# Altium PCB ExperimentBoard.PcbDoc
Units mil, origin at the board's own origin, x right, y up, seen from the top; angles counter-clockwise.
Board outline 3540 x 3540 mil, 4 copper layers (Top Layer, GND Layer, PWR Layer, Bottom Layer), stack 61.811 mil thick; 32 components, 57 nets, 238 pads, 67 vias.
Unrouted connection lines stored in the file: 9.
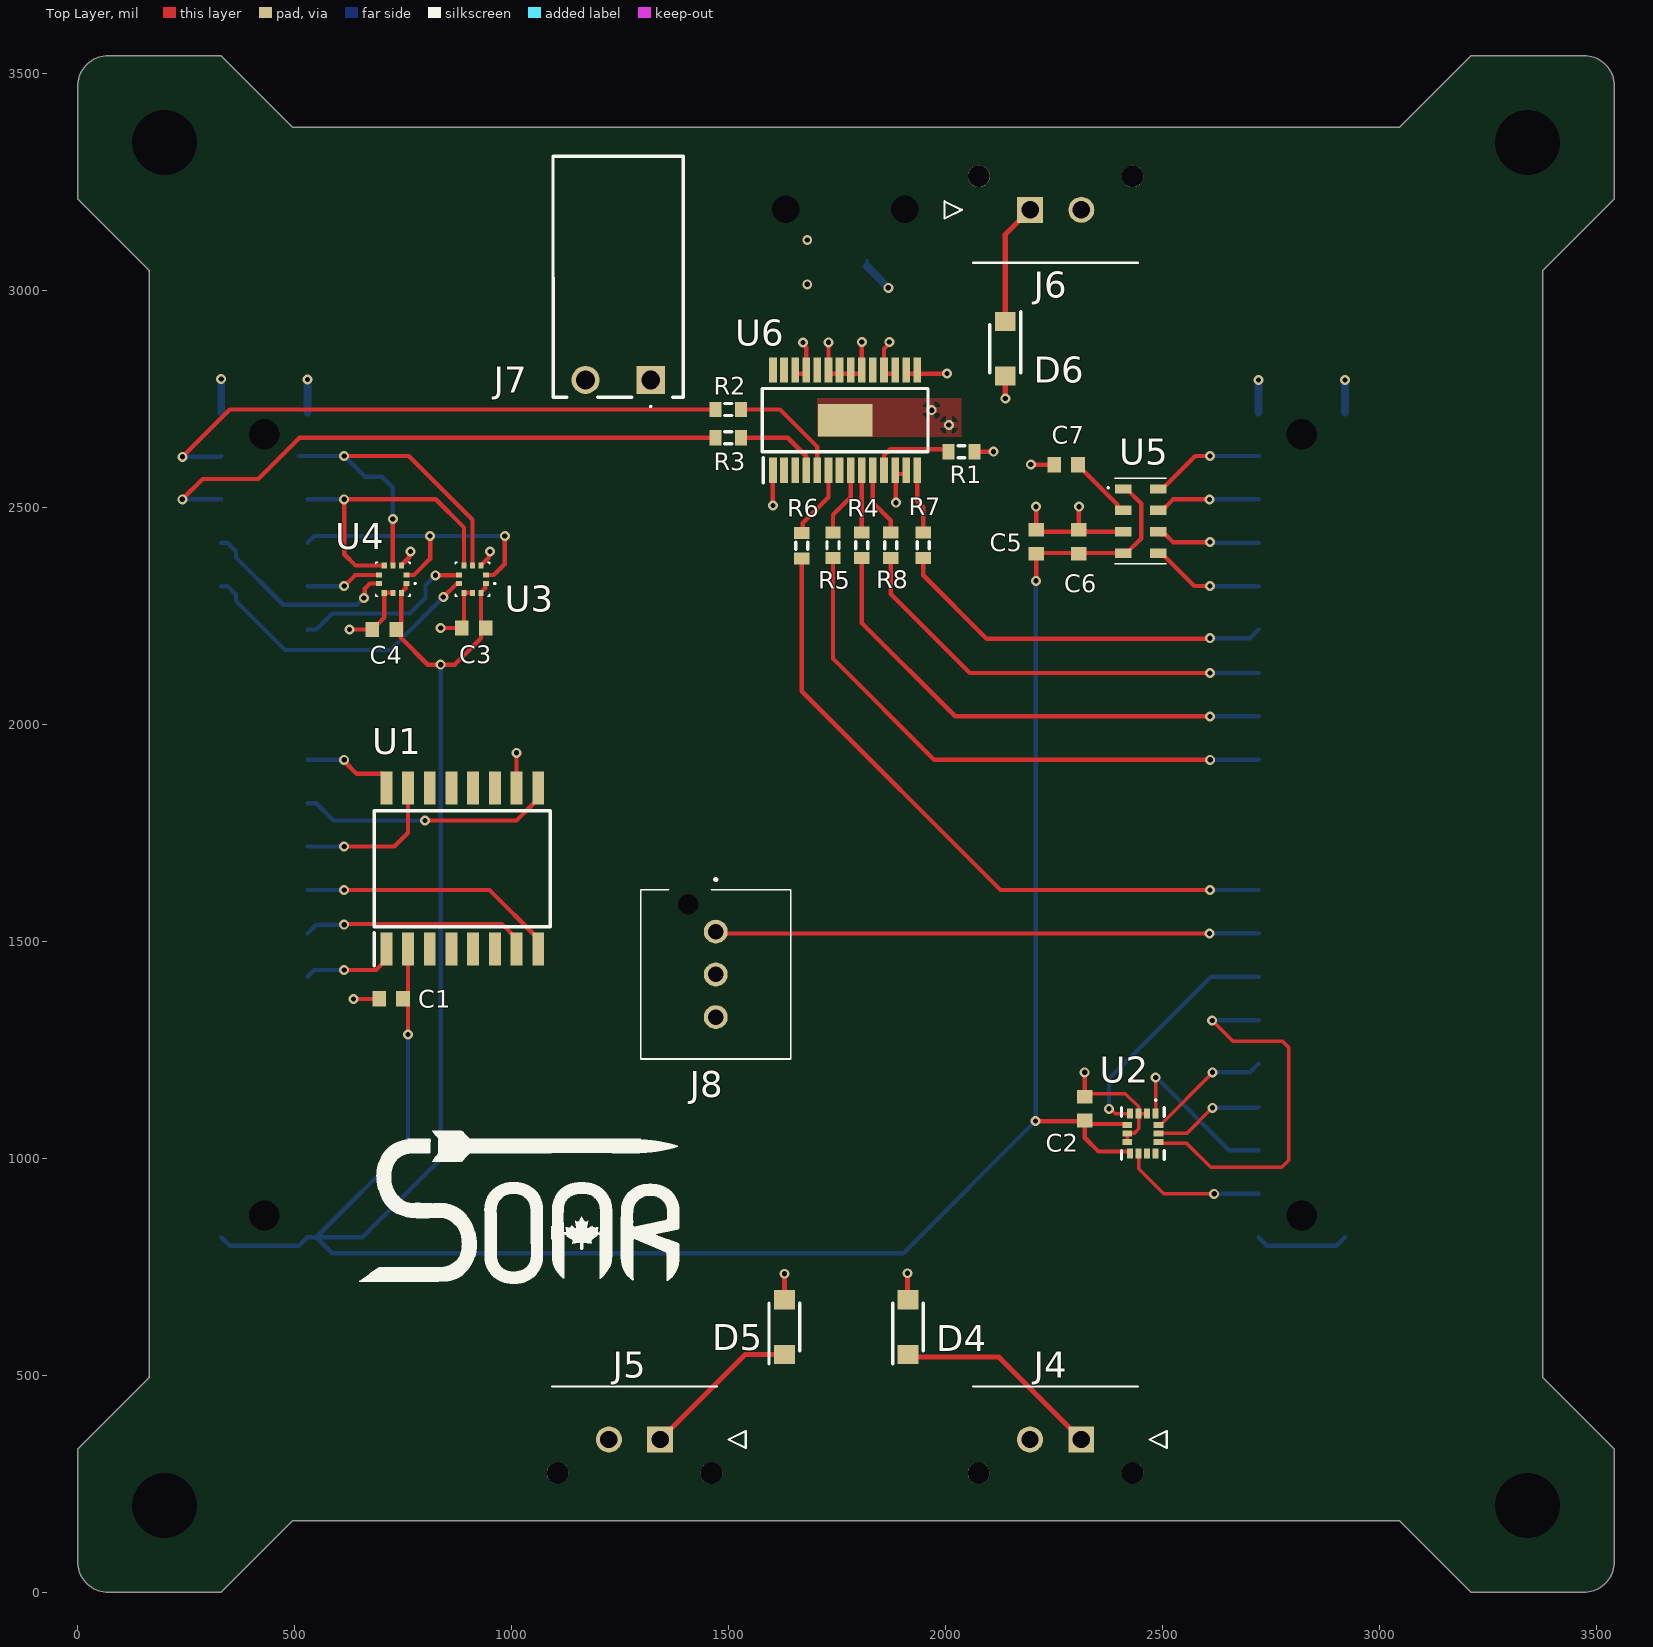
[diagram p0: Top Layer view]
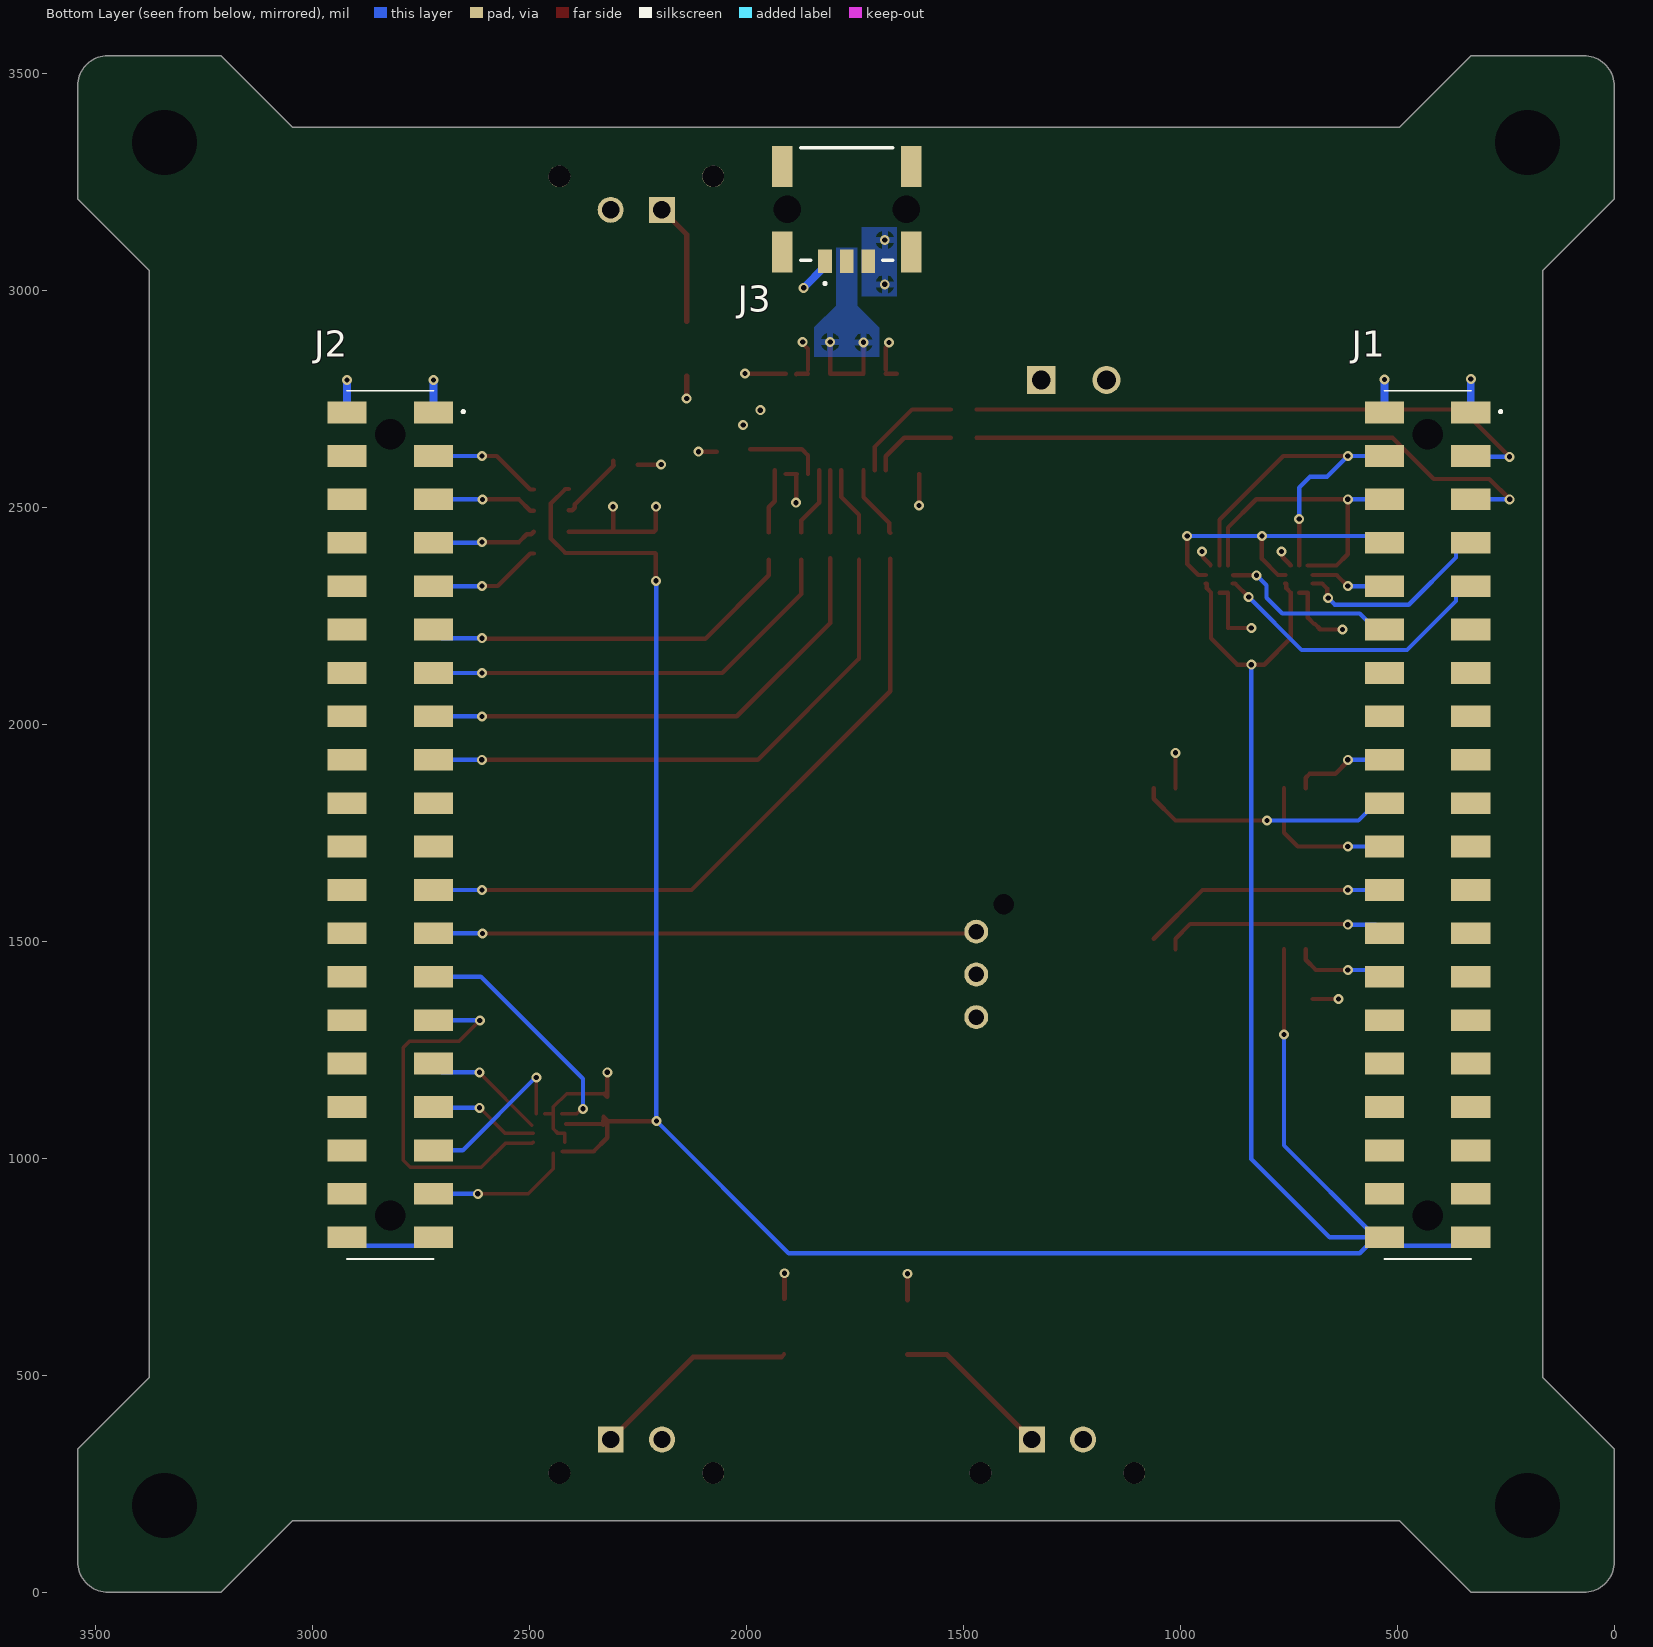
[diagram p1: Bottom Layer view, seen from below]
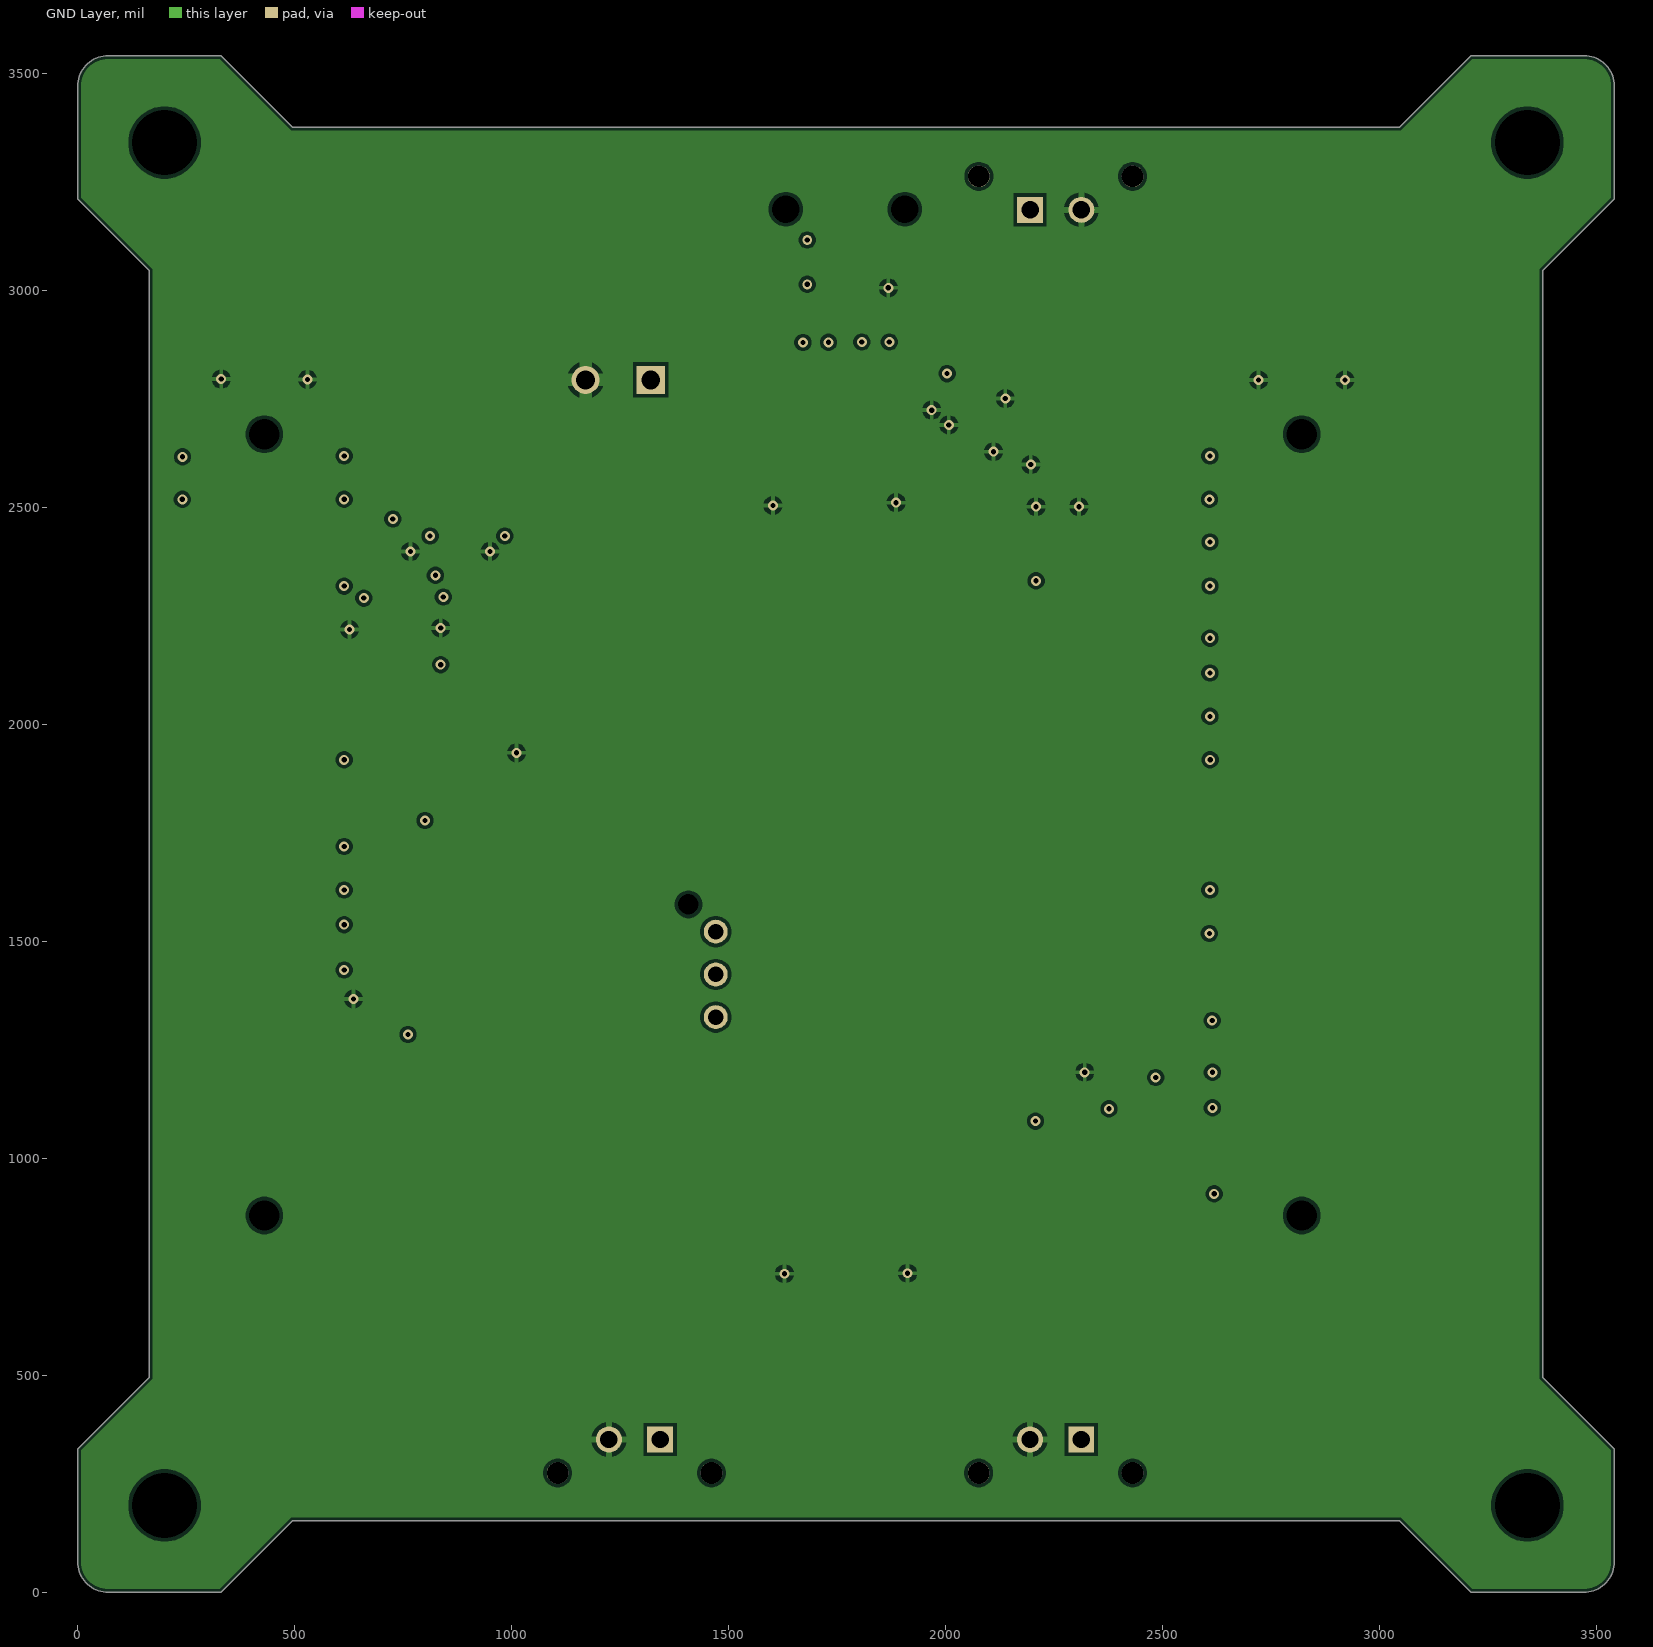
[diagram p2: GND Layer]
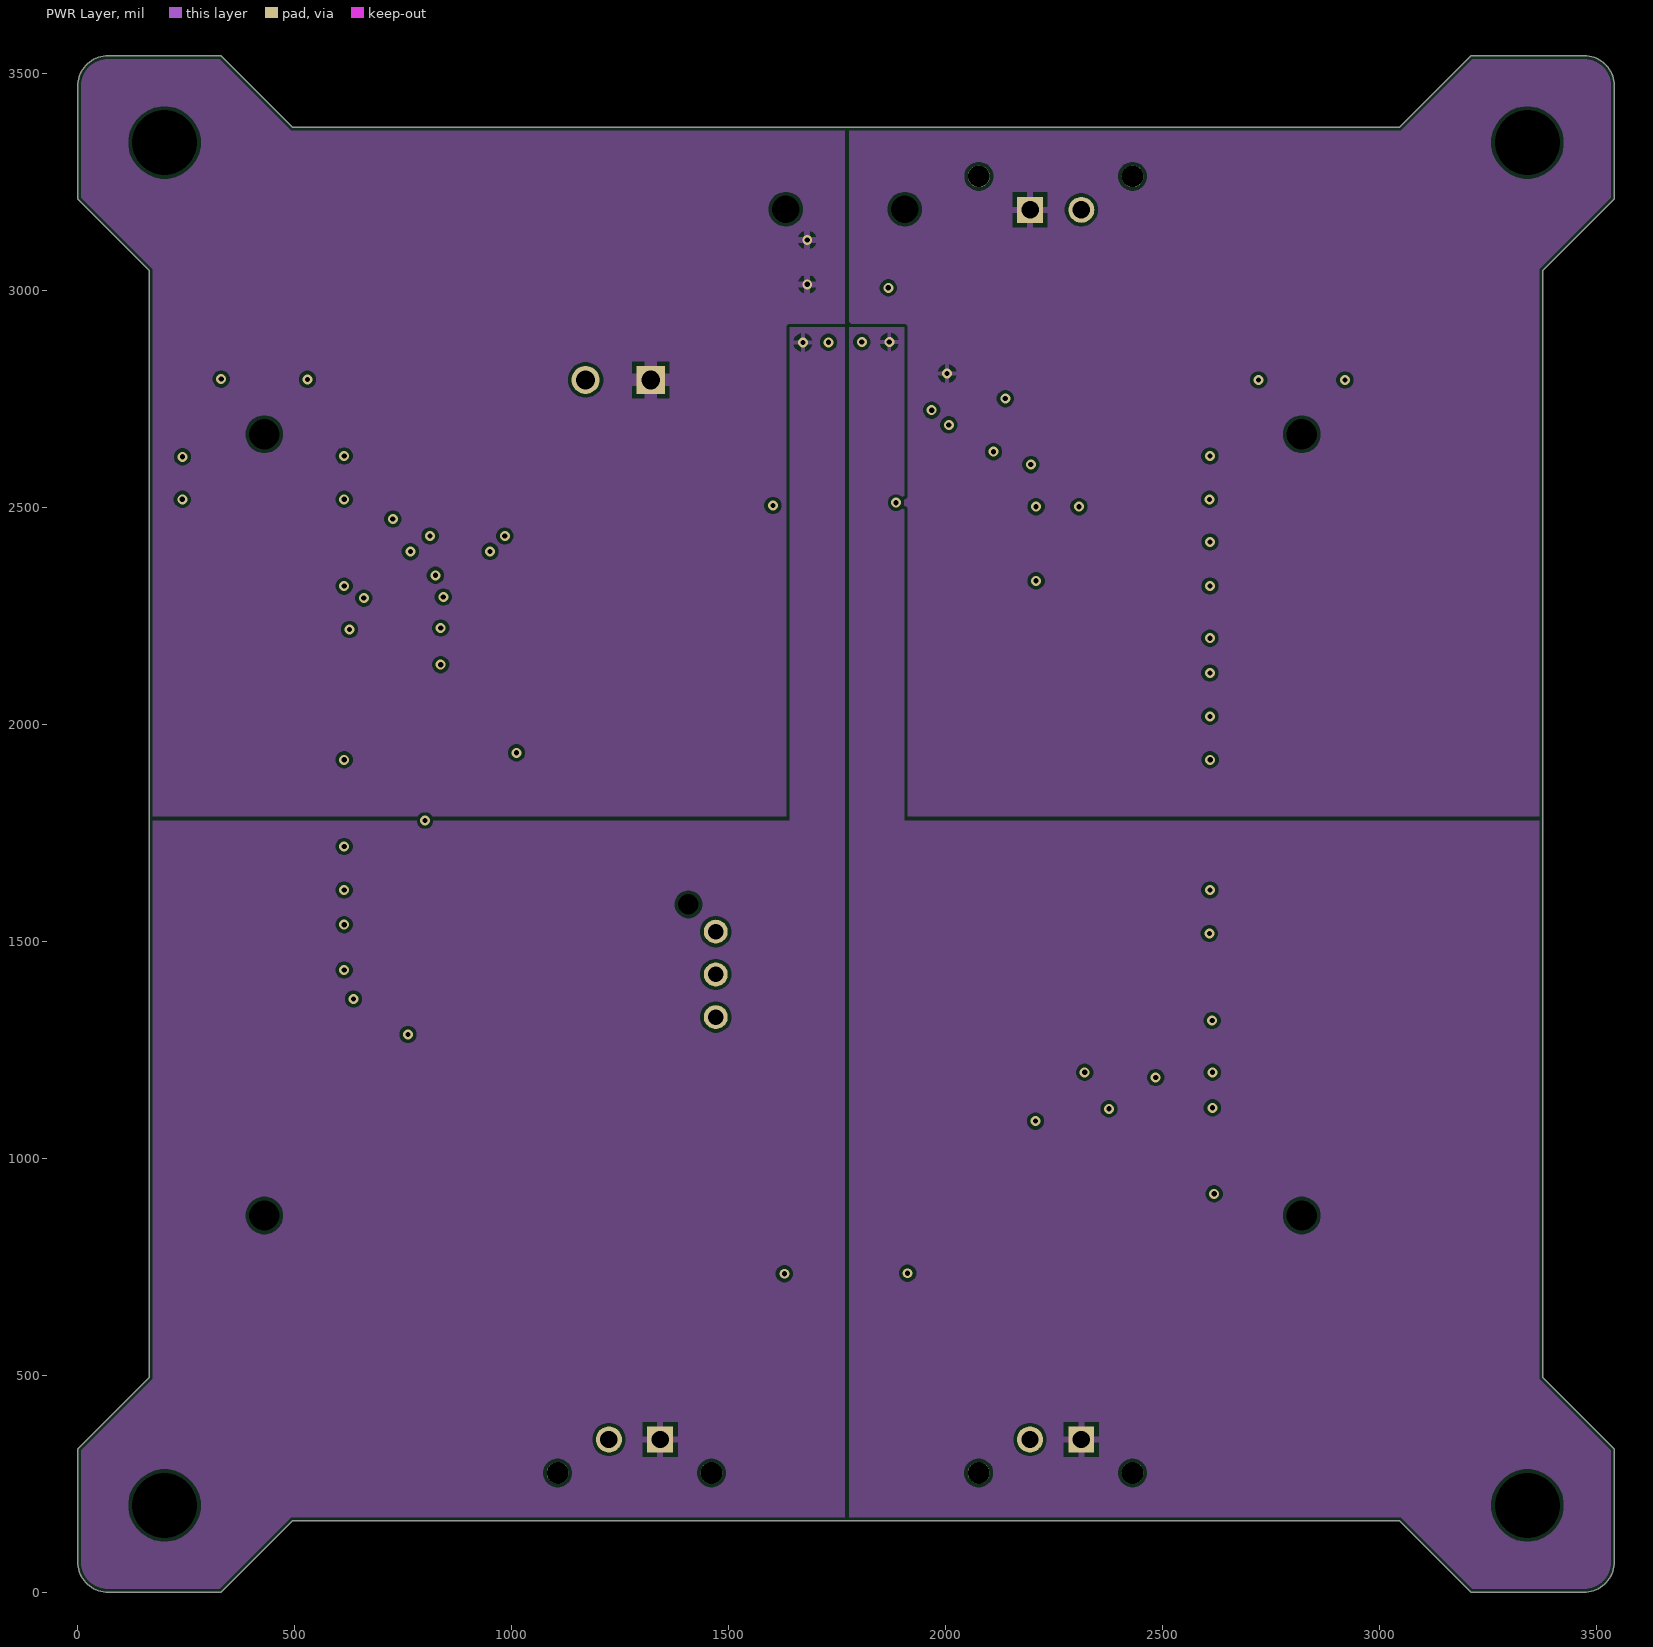
[diagram p3: PWR Layer]

## Layer stack, top to bottom
Top Mask: solder mask 0.591, Solder Resist, Dk 3.8
Top Layer: signal copper 1.378
Dielectric 1: prepreg 7.874, 7628, Dk 4.6
GND Layer: signal copper 0.689
Core: core 41.929, FR-4, Dk 4.5
PWR Layer: signal copper 0.689
Dielectric 2: prepreg 7.874, 7628, Dk 4.6
Bottom Layer: signal copper 1.378
Bottom Mask: solder mask 0.591, Solder Resist, Dk 3.8

## Board outline
0,3470 cw(c70,3470) 70,3540 330,3540 495,3375 3045,3375 3210,3540 3471,3540 cw(c3471,3471) 3540,3471 3540,3210 3375,3045 3375,495 3540,330 3540,70 cw(c3470,70) 3470,0 3210,0 3045,165 495,165 330,0 70,0 cw(c70,70) 0,70 0,330 165,495 165,3045 0,3210

## Design rules (kind name [scope] priority, off if disabled: settings)
BoardOutlineClearance [All] p1: gap=7.87 ignorepadtopadclearanceinfootprint=FALSE except(15.75: Arc-SplitBarrior Arc-SplitContinuation Track-SplitBarrior Track-SplitContinuation SMDPad-SplitBarrior SMDPad-SplitContinuation THPad-SplitBarrior THPad-SplitContinuation Via-SplitBarrior Via-SplitContinuation Fill-SplitBarrior Fill-SplitContinuation Poly-SplitBarrior Poly-SplitContinuation Region-SplitBarrior Region-SplitContinuation Text-SplitBarrior Text-SplitContinuation)
Clearance "Clearance Bottom Layer" [OnLayer('Bottom Layer')] p1: gap=8 ignorepadtopadclearanceinfootprint=TRUE except(10: Arc-Text Track-Text SMDPad-Text THPad-Text Via-Text Fill-Text Poly-Text Region-Text Text-Text)
Clearance "Clearance Top Layer" [OnLayer('Top Layer')] p2: gap=8 ignorepadtopadclearanceinfootprint=TRUE except(10: Arc-Text Track-Text SMDPad-Text THPad-Text Via-Text Fill-Text Poly-Text Region-Text Text-Text)
Clearance [All] p3: gap=7.87 ignorepadtopadclearanceinfootprint=FALSE except(3.5: Arc-Arc Arc-Track Arc-SMDPad Track-Track Track-SMDPad SMDPad-SMDPad; 5: Arc-Via Track-Via SMDPad-Via THPad-Via Via-Via; 10: Arc-Text Track-Text SMDPad-Text THPad-Text Via-Text Fill-Text Poly-Text Region-Text Text-Text)
HoleSize [All] p1: absolutevalues=TRUE maxlimit=248.03 minlimit=7.87 maxpercent=80.000 minpercent=20.000
MinimumAnnularRing [All] p1: minimumring=3
MinimumSolderMaskSliver [All] p1: minsoldermaskwidth=3.5
PolygonConnect PolygonConnect_3 [All vs IsNamedPolygon('12V1') OR IsNamedPolygon('12V2') OR InComponent('J7')] p1: thpad.connectstyle=Relief thpad.reliefconductorwidth=30 thpad.reliefentries=4 thpad.polygonreliefangle="90 Angle" thpad.airgapwidth=10 smdpad.connectstyle=Direct smdpad.reliefconductorwidth=10 smdpad.reliefentries=4 smdpad.polygonreliefangle="90 Angle" smdpad.airgapwidth=10 via.connectstyle=Relief via.reliefconductorwidth=15 via.reliefentries=4 via.polygonreliefangle="90 Angle" via.airgapwidth=10
PolygonConnect PolygonConnect_2 [(InComponent('J4') OR InComponent('J5') OR InComponent('J6'))] p2: thpad.connectstyle=Relief thpad.reliefconductorwidth=15 thpad.reliefentries=4 thpad.polygonreliefangle="90 Angle" thpad.airgapwidth=10 smdpad.connectstyle=Relief smdpad.reliefconductorwidth=10 smdpad.reliefentries=4 smdpad.polygonreliefangle="90 Angle" smdpad.airgapwidth=10 via.connectstyle=Relief via.reliefconductorwidth=10 via.reliefentries=4 via.polygonreliefangle="90 Angle" via.airgapwidth=10
PolygonConnect PolygonConnect_THER [All vs IsNamedPolygon('THER_GND')] p3: thpad.connectstyle=Relief thpad.reliefconductorwidth=10 thpad.reliefentries=4 thpad.polygonreliefangle="90 Angle" thpad.airgapwidth=10 smdpad.connectstyle=Direct smdpad.reliefconductorwidth=10 smdpad.reliefentries=4 smdpad.polygonreliefangle="90 Angle" smdpad.airgapwidth=10 via.connectstyle=Relief via.reliefconductorwidth=15 via.reliefentries=4 via.polygonreliefangle="90 Angle" via.airgapwidth=10
PolygonConnect [All] p4: connectstyle=Relief reliefconductorwidth=10 reliefentries=4 polygonreliefangle="90 Angle" airgapwidth=10
RoutingCorners [All] p1: cornerstyle=Round minsetback=100 maxsetback=100
RoutingVias [All] p1: holewidth=19.68 width=39.37 viastyle="Through Hole" minholewidth=7.87 minwidth=17.72 maxholewidth=39.37 maxwidth=78.74
SilkToSilkClearance [All] p1: silktosilkclearance=3.94
SilkToSolderMaskClearance [IsPad] p1: minsilkscreentomaskgap=3.94 clearancetoexposedcopper=TRUE
SolderMaskExpansion SolderMaskExpansion_2 [(InComponent('U3') OR InComponent('U4') OR InComponent('U6'))] p1: expansion=2 istentingtop=FALSE
SolderMaskExpansion SolderMaskExpansion_1 [InComponent('U2')] p2: expansion=1 istentingtop=FALSE
SolderMaskExpansion [All] p3: expansion=4 istentingtop=FALSE
Width [All] p1: maxlimit=100 minlimit=3.5 preferedwidth=15
25 further rules are at their usual default settings.

## Classes and differential pairs
polygon class Top_GND: GND

## Components (designator, comment, footprint, x,y, rotation, side; value= is the part's Value field where it differs from the comment)
C1 "0.1uF" 1608[0603] 722,1367 r0 top
C2 "0.1uF" 1608[0603] 2320,1114.28 r270 top
C3 "0.1uF" 1608[0603] 912.41,2221.53 r0 top
C4 "0.1uF" 1608[0603] 706.32,2218 r0 top
C5 "0.1uF" 1608[0603] 2208,2420 r90 top
C6 "10uF" 1608[0603] 2306.56,2420 r90 top value=0.1uF
C7 "0.1uF" 1608[0603] 2277,2598 r180 top
D4 "SL1J" SODFL3718X130N 1913,611 r90 top
D5 "SL1J" SODFL3718X130N 1628,611 r90 top
D6 "SL1J" SODFL3718X130N 2137,2865 r270 top
J1 "HLE-120-02-L-DV-A" HLE-120-02-XXX-DV-A 430,1768 r90 bottom
J2 "HLE-120-02-L-DV-A" HLE-120-02-XXX-DV-A 2820,1768 r90 bottom
J3 "234450" 234450 1768.38,3186.55 r0 bottom
J4 "43650-0216" 43650-02YY_151617 2312,352 r0 top
J5 "43650-0216" 43650-02YY_151617 1342,352 r0 top
J6 "43650-0216" 43650-02YY_151617 2194,3185 r180 top
J7 "284415-2" 2844152 1320,2793 r180 top
J8 "207843-0003" 2078430003 1470,1521.92 r90 top
R1 "800" J1-0603 2036,2627.64 r0 top value=1K
R2 "4.7k" J1-0603 1499,2725 r180 top value=1K
R3 "4.7k" J1-0603 1499,2660 r180 top value=1K
R4 "4.7k" J1-0603 1806.39,2412 r270 top value=1K
R5 "4.7k" J1-0603 1740,2412 r270 top value=1K
R6 "4.7k" J1-0603 1668,2411 r270 top value=1K
R7 "4.7k" J1-0603 1948,2412 r270 top value=1K
R8 "4.7k" J1-0603 1873.22,2412 r270 top value=1K
U1 "W25N01GVSFIG" SOIC127P1032X264-16N 886,1667 r90 top
U2 "LSM6DSO32TR" LSM6DSO 2454,1057 r270 top
U3 "LPS22HHTR" LPS22HHTR 909.5,2334 r180 top
U4 "LPS22HHTR" LPS22HHTR 726,2334 r180 top
U5 "MPL3115A2ST1" MPL3115A2R1 2449,2468 r0 top
U6 "TPS4H160AQPWPRQ1" SOP65P640X120-28N 1768,2700.48 r90 top

## Footprints (in the part's own frame and the unit in brackets; to place one, negate y for a bottom-side part, rotate by r counter-clockwise, add the part's x,y. Pads: shape width x height; smd on the part's side, far side on the other; paste and mask are expansions set on the pad)
1608[0603] [mm] "Chip Capacitor, Body 1.6x0.8mm, IPC High Density"
  rect 0.8x0.9 smd: 1(-0.7,0) 2(0.7,0)
  body extent -0.87,-0.48 0.87,0.48, height 1.3
43650-02YY_151617 [mm]
  rect 1.52x1.52 hole 1.02: 1(0,0)
  round 1.52 hole 1.02: 2(-3,0)
  round 1.27 hole 1.27 unplated: 3(3,-1.96) 4(-6,-1.96)
  silkscreen extent -6.32,-0.5 5,3.1, body extent -6.33,-2.44 3.31,3.17, height 9.77
234450 [mm]
  rect 0.8x1.4 smd: 1(1.27,3.05) 2(0,3.05) 3(-1.27,3.05)
  round 0.8 hole 1.6 unplated: MH1(-3.48,0) MH2(3.48,0)
  rect 1.2x2.4 smd: MP1(-3.78,2.5) MP2(-3.78,-2.5) MP3(3.78,-2.5) MP4(3.78,2.5)
  silkscreen extent -2.7,-3.6 2.7,4.4, body extent -4.44,-3.57 4.44,3.63, height 2.97
2844152 [mm]
  rect 1.65x1.65 hole 1.1: 1(0,0)
  round 1.65 hole 1.1: 2(3.81,0)
  silkscreen extent -1.9,-13.1 5.72,1.6, body extent -1.91,-13.1 5.72,1, height 7.8
2078430003 [mm]
  round 1.4 hole 0.9: 1(0,0) 2(-2.5,0) 3(-5,0)
  round 0.6 hole 1.2 unplated: MH1(1.6,1.6)
  silkscreen extent -7.45,-4.4 3.1,4.4, body extent -7.44,-4.2 2.48,4.2, height 8.54
HLE-120-02-XXX-DV-A [mm]
  rect 1.27x2.29 smd: 1(24.13,-2.525) 2(24.13,2.525) 3(21.59,-2.525) 4(21.59,2.525) 5(19.05,-2.525) 6(19.05,2.525) 7(16.51,-2.525) 8(16.51,2.525) 9(13.97,-2.525) 10(13.97,2.525) 11(11.43,-2.525) 12(11.43,2.525) 13(8.89,-2.525) 14(8.89,2.525) 15(6.35,-2.525) 16(6.35,2.525) 17(3.81,-2.525) 18(3.81,2.525) 19(1.27,-2.525) 20(1.27,2.525) 21(-1.27,-2.525) 22(-1.27,2.525) 23(-3.81,-2.525) 24(-3.81,2.525) 25(-6.35,-2.525) 26(-6.35,2.525) 27(-8.89,-2.525) 28(-8.89,2.525) 29(-11.43,-2.525) 30(-11.43,2.525) 31(-13.97,-2.525) 32(-13.97,2.525) 33(-16.51,-2.525) 34(-16.51,2.525) 35(-19.05,-2.525) 36(-19.05,2.525) 37(-21.59,-2.525) 38(-21.59,2.525) 39(-24.13,-2.525) 40(-24.13,2.525)
  round 0.89 hole 1.78 unplated: 41(22.86,0) 42(-22.86,0)
  silkscreen extent -25.4,-4.32 25.4,2.54
J1-0603 [mm] "Chip Resistor, Body 1.6x0.8mm, IPC High Density"
  rect 0.7x0.9 smd: 1(-0.75,0) 2(0.75,0)
  silkscreen extent -0.2,-0.35 0.2,0.35, body extent -0.85,-0.48 0.85,0.48, height 0.9
LPS22HHTR [mm]
  rect 0.35x0.3 smd: 1(-0.8,0.25) 2(-0.8,-0.25) 6(0.8,-0.25) 7(0.8,0.25)
  rect 0.3x0.35 smd: 3(-0.5,-0.8) 4(0,-0.8) 5(0.5,-0.8) 8(0.5,0.8) 9(0,0.8) 10(-0.5,0.8)
  silkscreen extent -1.35,-1 1,1, body extent -1,-1 1,1, height 0.8
LSM6DSO [mm]
  rect 0.575x0.35 smd: 1(-1.163,0.75) 2(-1.163,0.25) 3(-1.163,-0.25) 4(-1.163,-0.75) 8(1.163,-0.75) 9(1.163,-0.25) 10(1.163,0.25) 11(1.163,0.75)
  rect 0.35x0.575 smd: 5(-0.5,-0.913) 6(0,-0.913) 7(0.5,-0.913) 12(0.5,0.913) 13(0,0.913) 14(-0.5,0.913)
  silkscreen extent -2,-1.25 1.5,1.25, body extent -1.55,-1.3 1.55,1.3, height 0.87
MPL3115A2R1 [mm]
  rect 0.95x0.55 smd: 1(-1.025,1.875) 2(-1.025,0.625) 3(-1.025,-0.625) 4(-1.025,-1.875) 5(1.025,-1.875) 6(1.025,-0.625) 7(1.025,0.625) 8(1.025,1.875)
  silkscreen extent -1.95,-2.5 1.5,2.5, body extent -1.5,-2.5 1.5,2.5, height 1.3
SODFL3718X130N [mm]
  rect 1.12x1.22 smd: 1(-1.6,0) 2(1.6,0)
  silkscreen extent -2.16,-0.9 1.4,0.9, body extent -1.85,-0.9 1.85,0.9, height 1.3
SOIC127P1032X264-16N [mm]
  rect 1.93x0.7 smd: 1(-4.71,4.445) 2(-4.71,3.175) 3(-4.71,1.905) 4(-4.71,0.635) 5(-4.71,-0.635) 6(-4.71,-1.905) 7(-4.71,-3.175) 8(-4.71,-4.445) 9(4.71,-4.445) 10(4.71,-3.175) 11(4.71,-1.905) 12(4.71,-0.635) 13(4.71,0.635) 14(4.71,1.905) 15(4.71,3.175) 16(4.71,4.445)
  silkscreen extent -5.68,-5.14 3.39,5.15, body extent -5.16,-5.14 5.16,5.14, height 2.64
SOP65P640X120-28N [mm]
  rect 1.475x0.45 smd: 1(-2.938,4.225) 2(-2.938,3.575) 3(-2.938,2.925) 4(-2.938,2.275) 5(-2.938,1.625) 6(-2.938,0.975) 7(-2.938,0.325) 8(-2.938,-0.325) 9(-2.938,-0.975) 10(-2.938,-1.625) 11(-2.938,-2.275) 12(-2.938,-2.925) 13(-2.938,-3.575) 14(-2.938,-4.225) 15(2.938,-4.225) 16(2.938,-3.575) 17(2.938,-2.925) 18(2.938,-2.275) 19(2.938,-1.625) 20(2.938,-0.975) 21(2.938,-0.325) 22(2.938,0.325) 23(2.938,0.975) 24(2.938,1.625) 25(2.938,2.275) 26(2.938,2.925) 27(2.938,3.575) 28(2.938,4.225)
  rect 1.9x3.2 smd: 29(0,0)
  silkscreen extent -3.67,-4.85 1.85,4.85, body extent -3.2,-4.85 3.2,4.85, height 1.13

## Part data
C1 C2 C3 C4 C5 C6 C7: library part Cap, "Capacitor", LatestRevisionDate=17-Jul-2002, LatestRevisionNote="Re-released for DXP Platform.", PackageDescription="Radial Cap, Thru-Hole; 2 Leads; 0.3 in Pin Spacing", PackageReference=RAD-0.3, Published=8-Jun-2000, Publisher="Altium Limited"
D4 D5 D6: "Diode", Manufacturer_Name=Diotec, Mouser Part Number=637-SL1J, Arrow Part Number=SL1J, Arrow Price/Stock=https://www.arrow.com/en/products/sl1j/diotec-semiconductor-ag?region=europe, Datasheet Link=https://diotec.com/request/datasheet/sl1a.pdf, Height=1.3mm, Manufacturer_Part_Number=SL1J, Mouser Price/Stock=https://www.mouser.co.uk/ProductDetail/Diotec-Semiconductor/SL1J?qs=OlC7AqGiEDm%2FUyNJqMVviA%3D%3D
J1 J2: "Connector", Manufacturer_Name=SAMTEC, Mouser Part Number=200-HLE12002LDVA, Arrow Part Number=HLE-120-02-L-DV-A, Arrow Price/Stock=https://www.arrow.com/en/products/hle-120-02-l-dv-a/samtec?region=nac, Datasheet Link=http://suddendocs.samtec.com/prints/hle-1xx-02-xxx-dv-xx-xx-xx-mkt.pdf, Manufacturer_Part_Number=HLE-120-02-L-DV-A, Mouser Price/Stock=https://www.mouser.co.uk/ProductDetail/Samtec/HLE-120-02-L-DV-A?qs=0lQeLiL1qyZq0rwGrAI%2FeQ%3D%3D
J3: "Connector", Manufacturer_Name=ERNI, Mouser Part Number=305-234450, Arrow Part Number=234450, Arrow Price/Stock=https://www.arrow.com/en/products/234450/erni-electronics?region=europe, Datasheet Link=https://www.erni.com/fileadmin/import/products/assets/DC0000169.PDF, Height=2.98mm, Manufacturer_Part_Number=234450, Mouser Price/Stock=https://www.mouser.co.uk/ProductDetail/ERNI/234450?qs=DK05bRAVOD4CDOGVl35lNg%3D%3D
J4 J5 J6: "Connector", Manufacturer_Name=Molex, Mouser Part Number=538-43650-0216, Datasheet Link=https://www.molex.com/pdm_docs/sd/436500215_sd.pdf, Height=9.9mm, Manufacturer_Part_Number=43650-0216, Mouser Price/Stock=https://www.mouser.co.uk/ProductDetail/Molex/43650-0216?qs=EeaHXY5iaaOSmxGRwEX9Ng%3D%3D
J7: "Connector", Manufacturer_Name="TE Connectivity", Mouser Part Number=571-284415-2, Datasheet Link=https://www.te.com/commerce/DocumentDelivery/DDEController?Action=showdoc&DocId=Customer+Drawing%7F284415%7FD%7Fpdf%7FEnglish%7FENG_CD_284415_D.pdf%7F284415-2, Height=7.7mm, Manufacturer_Part_Number=284415-2, Mouser Price/Stock=https://www.mouser.co.uk/ProductDetail/TE-Connectivity/284415-2?qs=pW%2FyRk%2FT1EFeoMncfiUpUA%3D%3D
J8: "Connector", Manufacturer_Name=Molex, Mouser Part Number=538-207843-0003, Arrow Part Number=207843-0003, Arrow Price/Stock=https://www.arrow.com/en/products/2078430003/molex?region=nac, Datasheet Link=https://www.molex.com/pdm_docs/sd/2078430003_sd.pdf, Height=6.95mm, Manufacturer_Part_Number=207843-0003, Mouser Price/Stock=https://www.mouser.co.uk/ProductDetail/Molex/207843-0003?qs=XeJtXLiO41TegXAHRiYnCg%3D%3D
R1 R2 R3 R4 R5 R6 R7 R8: library part Res3, "Resistor", LatestRevisionDate=29-May-2009, LatestRevisionNote="IPC-7351 Footprint Added.", PackageDescription="Chip Resistor", PackageReference=J1-0603, Published=8-Jun-2000, Publisher="Altium Limited"
U1: "Integrated Circuit", Manufacturer_Name=Winbond, Mouser Part Number=454-W25N01GVSFIG, Arrow Part Number=W25N01GVSFIG, Arrow Price/Stock=https://www.arrow.com/en/products/w25n01gvsfig/winbond-electronics?region=nac, Datasheet Link=https://www.winbond.com/hq/search-resource-file.jsp?partNo=W25N01GVSFIG&type=datasheet, Height=2.64mm, Manufacturer_Part_Number=W25N01GVSFIG, Mouser Price/Stock=https://www.mouser.co.uk/ProductDetail/Winbond/W25N01GVSFIG?qs=qSfuJ%252Bfl%2Fd5wRcUOkRc5Cw%3D%3D
U2: library part LSM6DSO, "Accelerometer", Manufacturer_Name=STMicroelectronics, Mouser Part Number=N/A, Datasheet Link=https://www.st.com/en/mems-and-sensors/lsm6dso.html, Height=0.86mm, Manufacturer_Part_Number=LSM6DSO, Mouser Price/Stock=https://www.mouser.co.uk/ProductDetail/STMicroelectronics/LSM6DSO?qs=lc2O%252BfHJPVaWmEJZZeO%252B0w%3D%3D
U3 U4: "Integrated Circuit", Manufacturer_Name=STMicroelectronics, Mouser Part Number=511-LPS22HHTR, Arrow Part Number=LPS22HHTR, Arrow Price/Stock=https://www.arrow.com/en/products/lps22hhtr/stmicroelectronics?region=europe, Datasheet Link=https://www.st.com/resource/en/datasheet/lps22hh.pdf, Height=0.8mm, Manufacturer_Part_Number=LPS22HHTR, Mouser Price/Stock=https://www.mouser.co.uk/ProductDetail/STMicroelectronics/LPS22HHTR?qs=lc2O%252BfHJPVbKAkJQGWFcLg%3D%3D
U5: library part MPL3115A2R1, "Integrated Circuit", Manufacturer_Name=NXP, Mouser Part Number=841-MPL3115A2R1, Arrow Part Number=MPL3115A2R1, Arrow Price/Stock=https://www.arrow.com/en/products/mpl3115a2r1/nxp-semiconductors?region=nac, Datasheet Link=http://www.nxp.com/docs/en/data-sheet/MPL3115A2.pdf, Height=1.2mm, Manufacturer_Part_Number=MPL3115A2R1, Mouser Price/Stock=https://www.mouser.co.uk/ProductDetail/NXP-Semiconductors/MPL3115A2R1?qs=6ddF3R%2F6EV%2Fx8daKoNGetQ%3D%3D
U6: "Switch", Manufacturer_Name="Texas Instruments", Mouser Part Number=595-TPS4H160AQPWPRQ1, Arrow Part Number=TPS4H160AQPWPRQ1, Arrow Price/Stock=https://www.arrow.com/en/products/tps4h160aqpwprq1/texas-instruments?region=nac, Datasheet Link=http://www.ti.com/lit/gpn/tps4h160-q1, Height=1.2mm, Manufacturer_Part_Number=TPS4H160AQPWPRQ1, Mouser Price/Stock=https://www.mouser.co.uk/ProductDetail/Texas-Instruments/TPS4H160AQPWPRQ1?qs=l4JqiU1WKg3jmTHCrG9xTw%3D%3D

## Free pads (board coordinates)
  round 60 hole 150 unplated mask+10: 2(200,200) 2(200,3340) 2(3340,200) 2(3340,3340)

## Via types
v1: diameter 23, hole 12, Top Layer to Bottom Layer, 67 vias

## Nets (pads, with @x,y where several pads share a name; then routed paths per layer and width w, separated by ;. In a path a pad name is that pad's centre, name@x,y a point inside that pad or via, vN(x,y) a via of type N, cw(c..) or ccw(c..) an arc to the next point about the centre after c; other vN are vias at no path point)
3V3: C1.2 C2.2 C3.2 C4.2 C5.1 C6.1 J1.39 J1.40 U1.2 U2.5 U2.8 U3.1 U3.10 U4.1 U4.10 U5.1 U5.4 | length 6881
  Top Layer w10: U4.1@758.48,2324.16 U4.1 756.51,2324.16 755.61,2323.25 755.61,2313.41 745.68,2303.49 U4.10 745.68,2197.87 806.56,2137 v1(836.18,2137) 868.32,2137 929.19,2197.87 U3.10 929.19,2303.49 939.11,2313.41 939.11,2323.25 940.02,2324.16 U3.1 ; v1(761,1285) U1.2 ; v1(2206.72,1085.44) C2.2@2320,1085.44 ; v1(2208,2330.2) C5.1 2209.74,2394.18 U5.4 2416.52,2394.18 2450,2427.66 2450,2508.34 2416.52,2541.82 U5.1 ; C2.2@2326.89,1078.67 U2.5@2415,1078.67 ; C2.2@2329.39,1080.58 2328.76,1095.47 C2.2 ; C2.2@2329.43,1077.28 C2.2 ; U2.8@2422.58,1015.64 2351.49,1015.64 2320,1047.13 C2.2
  Bottom Layer w10: J1.39 350.59,798 509.41,798 J1.40 J1.40@549.49,818 ; v1(761,1285) 761,1029.51 J1.40@549.49,818 ; v1(836.18,2137) 836.18,998.36 655.82,818 J1.40@549.49,818 ; v1(2208,2330.2) 2207.36,2329.57 2207.36,1086.08 v1(2206.72,1085.44) 1902.28,781 586.49,781 J1.40@549.49,818
5V: J2.39 J2.40 | length 215.4
  Bottom Layer w10: J2.39 2740.59,798 2899.41,798 J2.40
12V1: J3.3 J7.1
  other v1: 1680.71,3013.32 1680.71,3115.42
12V2: J3.2 U6.20 U6.21 U6.22 U6.23 | length 221.5
  Top Layer w10: v1(1729.61,2879.76) 1729.61,2807.67 1755.2,2807.67 1780.8,2807.67 1806.39,2807.67 v1(1806.39,2880.26)
GND: C1.1 C2.1 C3.1 C4.1 C5.2 C6.2 C7.2 D4.2 D5.2 D6.2 J1.1 J1.2 J2.1 J2.2 J3.1 J4.2 J5.2 J6.2 J7.2 R1.2 U1.10 U2.2 U2.3 U2.6 U2.7 U3.3 U3.8 U3.9 U4.3 U4.8 U4.9 U5.3 U6.1 U6.12 U6.13 U6.29 | length 1983.3
  Top Layer w8: C2.1@2326.89,1148.73 2413.71,1148.73 2444.16,1118.28 U2.3 ; U2.7 U2.6 2433.55,1057 2444.16,1067.61 U2.3 ; U2.2 U2.3
  Top Layer w10: v1(626.04,2218) C4.1 678.76,2219.97 689.5,2230.72 691.47,2230.72 706.32,2245.56 U4.8 U4.9 ; v1(635.36,1367) C1.1 ; U4.3 746.59,2366.4 746.59,2367.39 763.95,2384.74 763.95,2395.01 v1(766.43,2397.5) ; v1(836.18,2221.53) C3.1 ; C3.1@889.82,2221.53 U3.8@889.82,2303.05 ; U3.8 U3.9 ; U3.3@930.09,2366.2 930.09,2367.39 947.45,2384.74 947.45,2395.57 v1(949.94,2398.06) ; v1(1010.78,1934) 1010.89,1933.89 1010.89,1852.54 U1.10 ; v1(1601.59,2503.97) U6.1@1601.63,2576.3 ; v1(1885.4,2510.28) 1884.28,2511.4 1884.28,2575.21 1883.16,2576.33 U6.13@1908.75,2576.33 ; D4.2@1912,676.99 D4.2@1913,675.99 ; R1.2@2068.13,2627.64 v1(2109.75,2627.64) ; v1(2195.82,2598) C7.2 ; v1(2208,2501) C5.2 2212.17,2443.39 U5.3 ; C6.2 v1(2306.56,2501) ; v1(2320,1198) C2.1 C2.1@2326.89,1148.73
  Top Layer w12: D5.2 v1(1628,733.85) ; D4.2@1912,676.99 v1(1912,735) ; v1(2137,2750) D6.2
  Bottom Layer w10: J3.1@1818.38,3054.66 J3.1
  Bottom Layer w18: J1.1 v1(330.59,2795) ; J1.2 v1@529.41,2795 ; J3.1@1818.38,3054.66 1867.45,3005.59 v1(1867.45,3005.31) ; J2.1 v1(2720.59,2793) ; J2.2 v1(2919.41,2793)
  other v1: 2006.84,2689.51 1967.51,2723.44 529.52,2794.36
"GPIO PA4": J1.7 U4.7 | length 463.4
  Top Layer w10: v1(659.07,2290.35) 661.56,2292.84 661.56,2312.61 673.1,2324.16 U4.7
  Bottom Layer w10: J1.7 344.73,2418 364.73,2398 364.73,2383.86 473.65,2274.94 643.66,2274.94 v1(659.07,2290.35)
"GPIO PA15": J2.37 U2.9 | length 335.8
  Top Layer w8: U2.9 2444.16,975.84 2502,918 v1(2618.36,918)
  Bottom Layer w10: v1(2618.36,918) J2.37
"GPIO PB0": J1.10 U4.6 | length 175.8
  Top Layer w10: v1(613.86,2318) 639.7,2343.84 U4.6
  Bottom Layer w10: J1.10 v1(613.86,2318)
"GPIO PB1": J1.12 U3.6 | length 419.2
  Top Layer w10: v1(824,2343) 824.42,2343.42 877.59,2343.42 U3.6
  Bottom Layer w10: J1.12@530.41,2217 J1.12 549.49,2218 586.49,2255 765.11,2255 801.28,2291.17 801.28,2320.28 v1(824,2343)
"GPIO PB2": J1.9 U3.7 | length 681
  Top Layer w10: v1(842.23,2292.84) 873.47,2324.08 U3.7@879.05,2324.08
  Bottom Layer w10: J1.9 344.73,2318 364.73,2298 364.73,2283.86 477.59,2171 720.39,2171 v1(842.23,2292.84)
"GPIO PB3": J2.21
"GPIO PB4": J2.25 J8.1 | length 1251.5
  Top Layer w10: J8.1@1470,1512.37 1475.27,1517.64 v1(2607.14,1517.64)
  Bottom Layer w10: v1@2608.39,1518 J2.25
"GPIO PB5": J2.23 R6.2 | length 1547.8
  Top Layer w10: R6.2 1668,2076 2126,1618 v1(2608.39,1618)
  Bottom Layer w10: v1(2608.39,1618) J2.23
"GPIO PC4": J1.3 R2.2 | length 1363.7
  Top Layer w10: v1(241.18,2615.97) 350.21,2725 R2.2
  Bottom Layer w10: v1(241.18,2615.97) 328.56,2615.97 J1.3
"GPIO PC5": J1.5 R3.2 | length 1376.9
  Top Layer w10: v1(241,2518) 288,2565 416,2565 511,2660 R3.2
  Bottom Layer w10: v1(241,2518) J1.5
"GPIO PD14": J1.30
"GPIO PE0": J2.13 R8.2 | length 1001.8
  Top Layer w10: R8.2@1873.22,2378.54 1873.22,2299.78 2055,2118 v1(2608.39,2118)
  Bottom Layer w10: v1@2608,2118 v1(2608.39,2118) J2.13
"GPIO PE1": J2.11 R7.2 | length 877.7
  Top Layer w10: R7.2@1948,2378.54 1948,2343 2094.5,2196.5 2606.89,2196.5 v1(2608.39,2198)
  Bottom Layer w10: v1(2608.39,2198) 2700.59,2198 J2.11
"GPIO PG15": J2.19
I2C1-SCL: J2.5 U5.7 | length 240.4
  Top Layer w10: U5.7@2489.35,2491.61 2497.23,2491.61 2523.55,2517.93 v1(2607.64,2517.93)
  Bottom Layer w10: v1@2609.39,2518 J2.5
I2C1-SDA: J2.3 U5.8 | length 263.2
  Top Layer w10: U5.8@2489.35,2540.82 2497.23,2540.82 2574.41,2618 v1(2608.39,2618)
  Bottom Layer w10: v1(2608.39,2618) J2.3
I2C4-SCL: J1.14
I2C4-SDA: J1.16
NetC7_1: C7.1 U5.2 | length 160.2
  Top Layer w10: C7.1@2304.73,2596.52 2394.94,2506.31 2394.94,2498.43 2400.77,2492.61 U5.2 ; C7.1@2306.21,2598 C7.1@2306.21,2606.66
NetR1_1: R1.1 U6.11 | length 181.6
  Top Layer w10: U6.11@1857.57,2576.33 U6.11 1857.57,2619.17 1871.62,2633.22 1990.47,2633.22
NetR2_1: R2.1 U6.5 | length 265.1
  Top Layer w10: R2.1 1617.71,2725 1704.02,2638.69 U6.5
NetR3_1: R3.1 U6.4 | length 200
  Top Layer w10: R3.1 1635.64,2660 1678.43,2617.21 U6.4
NetR4_1: R4.1 U6.9 | length 143.3
  Top Layer w10: R4.1 U6.9
NetR5_1: R5.1 U6.8 | length 160.2
  Top Layer w10: R5.1 1740,2482.47 1780.8,2523.26 U6.8
NetR6_1: R6.1 U6.6 | length 169.8
  Top Layer w10: R6.1 1670.4,2442.92 1670.4,2463.45 1729.61,2522.67 U6.6
NetR7_1: R7.1 U6.14 | length 148.9
  Top Layer w10: U6.14 1934.34,2513.38 1948,2499.72 R7.1
NetR8_1: R8.1 U6.10 | length 160.4
  Top Layer w10: U6.10 1831.98,2510.31 1873.22,2469.06 R8.1
OUT2: D5.1 J5.1 U6.25 U6.26 | length 459.2
  Top Layer w10: U6.26@1652.84,2807.67 U6.25@1678.43,2807.67 ; v1(1670.66,2879.39) 1670.66,2875.87 1678.43,2868.09 U6.25
  Top Layer w12: J5.1 1538.01,548.01 D5.1
OUT3: D4.1 J4.1 U6.17 U6.18 | length 577.4
  Top Layer w10: U6.18@1857.57,2807.67 1883.16,2807.67 U6.17@1884.89,2805.94 ; U6.18 1857.57,2864.57 1869.75,2876.75 v1(1869.75,2880.26) ; D4.1 D4.1@1919.01,542
  Top Layer w12: D4.1@1919.01,542 2122,542 J4.1
OUT4: D6.1 J6.1 U6.15 U6.16 | length 374.9
  Top Layer w10: U6.16@1908.75,2807.67 v1(2003,2807.67)
  Top Layer w12: D6.1 2137,3128 J6.1
QSPI-CLK: J1.18 U1.16 | length 225
  Top Layer w10: v1(613.86,1918) 613.86,1914.48 642.92,1885.43 702.22,1885.43 711,1876.65 U1.16
  Bottom Layer w10: J1.18 v1(613.86,1918)
QSPI_BK1_IO0: J1.22 U1.15 | length 347.3
  Top Layer w10: v1(613.86,1718) 729,1718 761,1750 U1.15
  Bottom Layer w10: J1.22 v1(613.86,1718)
QSPI_BK1_IO1: J1.24 U1.8 | length 578.1
  Top Layer w10: v1(613.86,1618) 948.78,1618 U1.8@1061,1505.78
  Bottom Layer w10: J1.24 v1(613.86,1618)
QSPI_BK1_IO2: J1.20 U1.9 | length 593.2
  Top Layer w10: v1(800.28,1778) 1010.78,1778 1061,1828.22 U1.9
  Bottom Layer w10: J1.20 549.49,1818 589.49,1778 v1(800.28,1778)
QSPI_BK1_IO3: J1.28 U1.1 | length 222.1
  Top Layer w10: v1(613.86,1433.73) 687.38,1433.73 711,1457.35 U1.1
  Bottom Layer w10: J1.28 545.14,1433.73 v1(613.86,1433.73)
QSPI_BK1_NCS: J1.26 U1.7 | length 528.7
  Top Layer w10: v1(613.86,1538) 615.42,1539.56 977.22,1539.56 1011,1505.78 U1.7
  Bottom Layer w10: J1.26 549.41,1538 v1(613.86,1538)
QSPI_BK2_IO0: J1.32
QSPI_BK2_IO1: J1.34
QSPI_BK2_IO2: J1.36
QSPI_BK2_IO3: J1.38
SPI2-MISO: J1.6 U3.5 U4.5 | length 704.4
  Top Layer w10: U4.5 639.96,2365.5 613.86,2391.6 v1(613.86,2518) 824.6,2518 889.82,2452.78 U3.5
  Bottom Layer w10: J1.6 v1(613.86,2518)
SPI2-MOSI: J1.4 U3.4 U4.4 | length 888.4
  Top Layer w10: v1(613.86,2618) 762.47,2618 909.5,2470.96 U3.4 ; U4.4 v1(726,2472.78)
  Bottom Layer w10: J1.4@509.33,2618 J1.4 v1(613.86,2618) 661.86,2570 701,2570 726,2545 v1(726,2472.78)
SPI2-SCK: J1.8 U3.2 U4.2 | length 700.5
  Top Layer w10: U4.2 774.7,2343.84 811.83,2380.97 v1(811.83,2433.37) ; U3.2 958.58,2343.84 983.85,2369.11 v1(983.85,2433.37)
  Bottom Layer w10: J1.8 544.78,2433.37 v1(983.85,2433.37)
SPI6-MISO: J2.35 U2.1 | length 389.6
  Top Layer w8: U2.1 v1(2483.53,1185.82)
  Bottom Layer w10: v1(2483.53,1185.82) 2485.18,1185.82 2653,1018 J2.35
SPI6-MOSI: J2.31 U2.14 | length 286.4
  Top Layer w8: U2.14@2493.84,1076.16 v1@2614.08,1196.39
  Top Layer w10: v1@2614.08,1196.39 v1(2614.08,1198)
  Bottom Layer w10: v1(2614.08,1198) 2700.59,1198 J2.31
SPI6-SCK: J2.33 U2.13 | length 255.9
  Top Layer w8: U2.13 2555.02,1057 v1(2614.08,1116.06)
  Bottom Layer w10: v1(2614.08,1116.06) 2718.65,1116.06 J2.33
UART4-RX: J2.17 R5.2 | length 1304.6
  Top Layer w10: R5.2@1740,2378.54 1740,2151 1973,1918 v1(2609,1918)
  Bottom Layer w10: v1(2609,1918) J2.17
UART4-TX: J2.15 R4.2 | length 1153
  Top Layer w10: R4.2 1806.39,2233.14 2021.52,2018 v1(2608.39,2018)
  Bottom Layer w10: v1@2608,2018 v1(2608.39,2018) J2.15
UART5-RX: J2.27 U2.4 | length 564
  Top Layer w8: v1@2379.58,1113.73 2390.52,1102.79 U2.4
  Top Layer w10: v1(2376.06,1113.73) v1@2379.58,1113.73
  Bottom Layer w10: v1(2376.06,1113.73) 2376.06,1182.85 2611.21,1418 J2.27
UART5-TX: J2.29 U2.12 | length 899.7
  Top Layer w8: U2.12 2492.72,1034.54 2554.57,1034.54 2610.11,979 2774,979 2790,995 2790,1255 2775,1270 2661,1270 v1(2613.61,1317.39)
  Bottom Layer w10: v1@2614,1318 J2.29
USART2-RX: J2.7 U5.6 | length 240.4
  Top Layer w10: U5.6 2495.18,2437.57 2505.49,2437.57 2523.55,2419.5 v1(2608.64,2419.5)
  Bottom Layer w10: v1@2609.39,2418 J2.7
USART2-TX: J2.9 U5.5 | length 261.5
  Top Layer w10: U5.5@2489.35,2393.18 2497.23,2393.18 2572.09,2318.32 v1(2608.64,2318.32)
  Bottom Layer w10: v1@2609.39,2318 J2.9
pads on no net: J1.11 J1.13 J1.15 J1.17 J1.19 J1.21 J1.23 J1.25 J1.27 J1.29 J1.31 J1.33 J1.35 J1.37 J1.41 J1.42 J2.4 J2.6 J2.8 J2.10 J2.12 J2.14 J2.16 J2.18 J2.20 J2.22 J2.24 J2.26 J2.28 J2.30 J2.32 J2.34 J2.36 J2.38 J2.41 J2.42 J3.MH1 J3.MH2 J3.MP1 J3.MP2 J3.MP3 J3.MP4 J4.3 J4.4 J5.3 J5.4 J6.3 J6.4 J8.2 J8.3 J8.MH1 U1.3 U1.4 U1.5 U1.6 U1.11 U1.12 U1.13 U1.14 U2.10 U2.11 U6.2 U6.3 U6.7 U6.19 U6.24 U6.27 U6.28

## Polygon pours and split planes (outlines as drawn)
12V1 on PWR Layer "12V1" (solid, pour order 19): 0,3470 cw(c70,3470) 70,3540 330,3540 495,3375 1767,3375 1767,1788 165,1788 165,3045 0,3210
OUT4 on PWR Layer "OUT4" (solid, pour order 25): 1777,3375 3055,3375 3220,3540 3481,3540 cw(c3481,3471) 3550,3471 3550,3210 3385,3045 3385,1788 1777,1788
OUT3 on PWR Layer "OUT3" (solid, pour order 23): 1777,1777.8 3385,1777.8 3385,495 3550,330 3550,70 cw(c3480.01,69.99) 3480,0 3220,0 3055,165 1777,165
OUT2 on PWR Layer "OUT2_Path" (solid, pour order 16): 1640,2914 1767,2914 1767,1778 1640,1778
OUT3 on PWR Layer "OUT3_Path" (solid, pour order 18): 1777.2,2914 1904.33,2914 1904.33,1777.8 1777.2,1777.8
OUT2 on PWR Layer "OUT2" (solid, pour order 22): 165,1778 1767,1778 1767,165 495,165 330,0 70,0 cw(c70,70) 0,70 0,330 165,495
12V2 on Bottom Layer "12V2" (solid, pour order 14): 1692.88,2846.53 1842.88,2846.53 1842.88,2914 1792.63,2964.25 1792.63,3098 1744.3,3098 1744.3,2964.42 1692.88,2913
12V1 on Bottom Layer "12V1" (solid, pour order 12): 1734,2986 1734,2986.61 1734,3145.05 1653.05,3145.05 1653.05,2986
GND on Top Layer "THER_GND" (solid, pour order 29): 1704.02,2751 2036,2751 2036,2662.33 1704.02,2662.33
GND on GND Layer "GND" (solid, pour order 3): 0,3470 cw(c70,3470) 70,3540 330,3540 495,3375 3045,3375 3210,3540 3471,3540 cw(c3471,3471) 3540,3471 3540,3210 3375,3045 3375,495 3540,330 3540,70 cw(c3470,70) 3470,0 3210,0 3045,165 495,165 330,0 70,0 cw(c70,70) 0,70 0,330 165,495 165,3045 0,3210

## Silkscreen, mask and mechanical layers (free items; w line width, h text height)
Top Overlay:
  drawing of 5 lines, arcs and shapes, not listed
Board Outline:
  the board outline again, w4